# EAGLE board display_tiled (EAGLE 5.02)
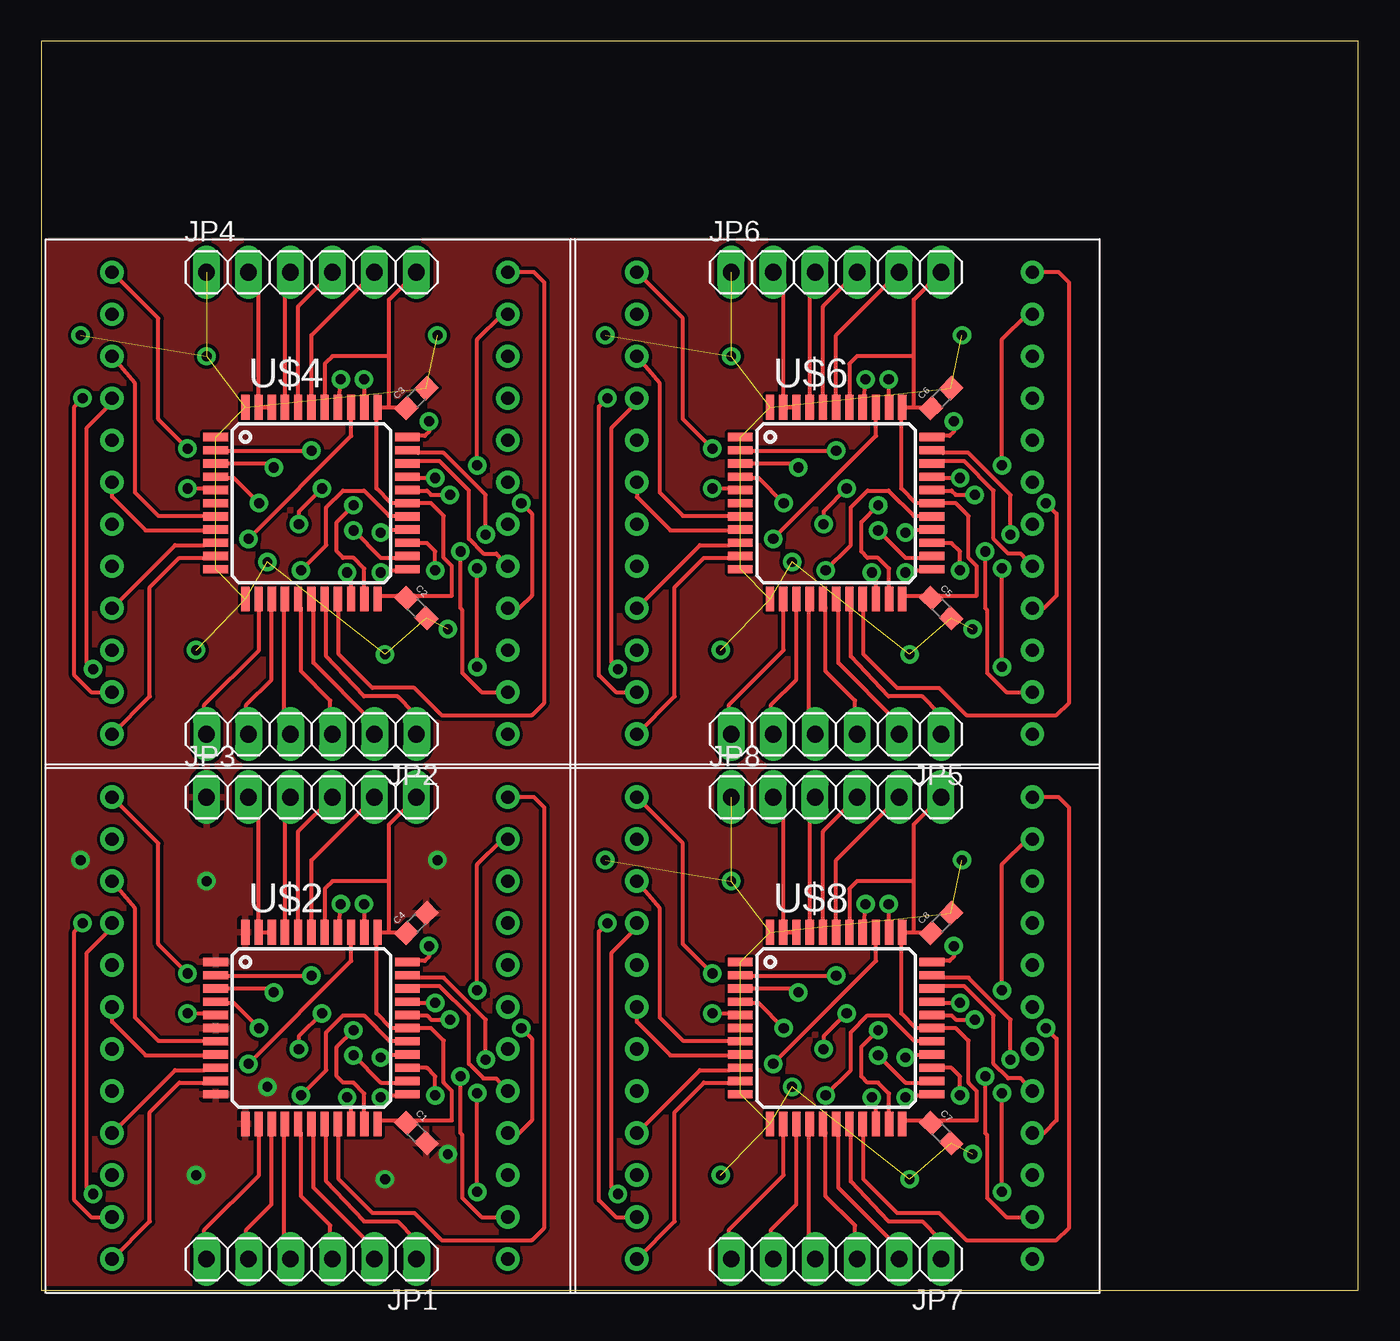
[diagram p0: board, top side]
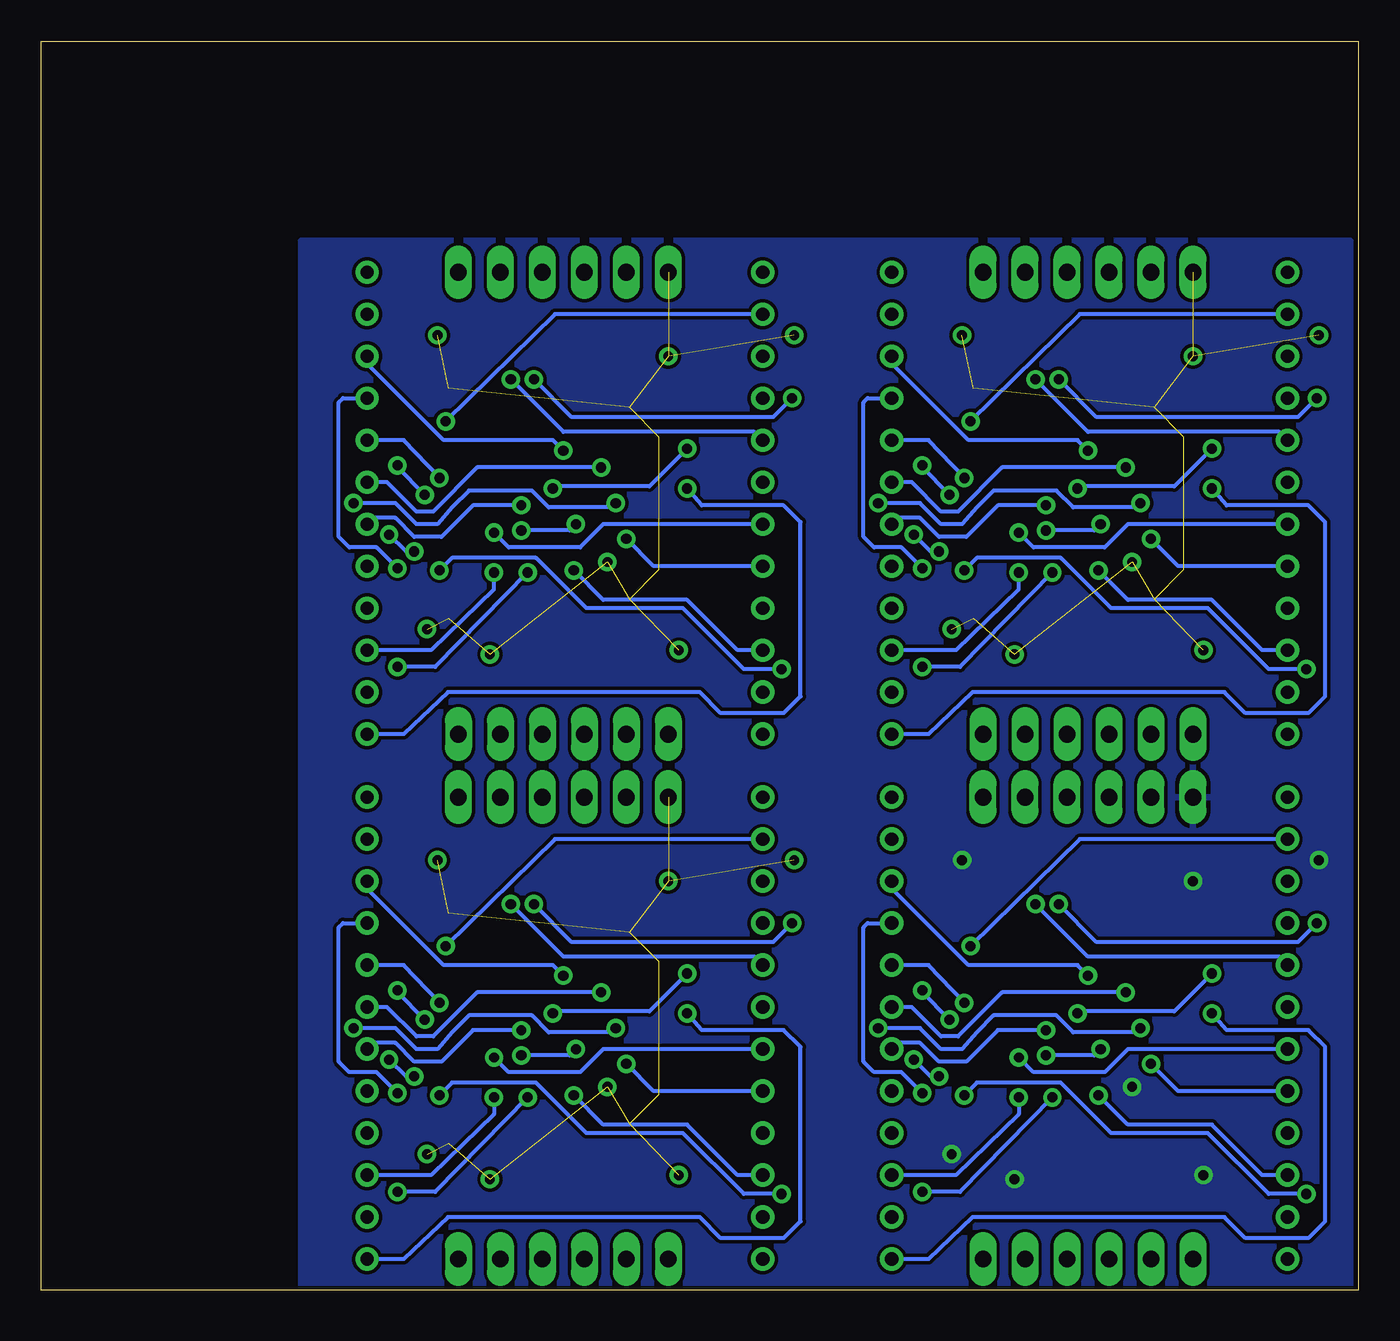
[diagram p1: board, bottom side, seen from below]

Size 79.68 x 75.55 mm. Coordinates in mm from the lower left corner, seen from the top.
Outline: 0,0 79.68,0 79.68,75.55 0,75.55 0,0
Copper layers (1*16): Top 0.035mm / dielectric 1.5mm / Bottom 0.035mm
Design rules "SparkFun": minimum track width 8mil, minimum drill 20mil, track to track 8mil, track to pad 8mil, pad to pad 8mil, via to via 8mil, smd to smd 8mil, copper to edge 10mil, drill to drill 8mil, minimum pad ring 12mil, minimum via ring 10mil, stop-mask expansion 4mil, vias tented up to drill 25mil, thermal gap 10mil

## Footprints (pad centres in the part's own frame; a part is rotated, then mirrored left to right if it is on the bottom)
0603 = smd 1.1 x 1: 1 -0.85,0; 2 0.85,0
1X06 = drill 1.016 long: 1 -6.35,0; 2 -3.81,0; 3 -1.27,0; 4 1.27,0; 5 3.81,0; 6 6.35,0
FYM-12881ABXX = drill 0.8 round: P$1 0,0; P$2 0,-2.54; P$3 0,-5.08; P$4 0,-7.62; P$5 0,-10.16; P$6 0,-12.7; P$7 0,-15.24; P$8 0,-17.78; P$9 0,-20.32; P$10 0,-22.86; P$11 0,-25.4; P$12 0,-27.94; P$13 23.94,-27.94; P$14 23.94,-25.4; P$15 23.94,-22.86; P$16 23.94,-20.32; P$17 23.94,-17.78; P$18 23.94,-15.24; P$19 23.94,-12.7; P$20 23.94,-10.16; P$21 23.94,-7.62; P$22 23.94,-5.08; P$23 23.94,-2.54; P$24 23.94,0
TQFP44 = smd 1.5 x 0.5: 1 -5.8,4; 2 -5.8,3.2; 3 -5.8,2.4; 4 -5.8,1.6; 5 -5.8,0.8; 6 -5.8,0; 7 -5.8,-0.8; 8 -5.8,-1.6; 9 -5.8,-2.4; 10 -5.8,-3.2; 11 -5.8,-4; 23 5.8,-4; 24 5.8,-3.2; 25 5.8,-2.4; 26 5.8,-1.6; 27 5.8,-0.8; 28 5.8,0; 29 5.8,0.8; 30 5.8,1.6; 31 5.8,2.4; 32 5.8,3.2; 33 5.8,4 | smd 0.5 x 1.5: 12 -4,-5.8; 13 -3.2,-5.8; 14 -2.4,-5.8; 15 -1.6,-5.8; 16 -0.8,-5.8; 17 0,-5.8; 18 0.8,-5.8; 19 1.6,-5.8; 20 2.4,-5.8; 21 3.2,-5.8; 22 4,-5.8; 34 4,5.8; 35 3.2,5.8; 36 2.4,5.8; 37 1.6,5.8; 38 0.8,5.8; 39 0,5.8; 40 -0.8,5.8; 41 -1.6,5.8; 42 -2.4,5.8; 43 -3.2,5.8; 44 -4,5.8

## Placement (x,y rotation side)
C1  [0603]  22.7,9.52 315 top
C2  [0603]  22.7,41.27 315 top
C3  [0603]  22.7,53.97 45 top
C4  [0603]  22.7,22.22 45 top
C5  [0603]  54.45,41.27 315 top
C6  [0603]  54.45,53.97 45 top
C7  [0603]  54.45,9.52 315 top
C8  [0603]  54.45,22.22 45 top
JP1  [1X06]  16.34,1.9 180 top
JP2  [1X06]  16.34,33.65 180 top
JP3  [1X06]  16.34,29.84 0 top
JP4  [1X06]  16.34,61.59 0 top
JP5  [1X06]  48.1,33.65 180 top
JP6  [1X06]  48.1,61.59 0 top
JP7  [1X06]  48.1,1.9 180 top
JP8  [1X06]  48.1,29.84 0 top
U$1  FYM-1228AXX  [FYM-12881ABXX]  4.28,29.84 0 top
U$2  MAX6960  [TQFP44]  16.34,15.87 0 top
U$3  FYM-1228AXX  [FYM-12881ABXX]  4.28,61.59 0 top
U$4  MAX6960  [TQFP44]  16.34,47.62 0 top
U$5  FYM-1228AXX  [FYM-12881ABXX]  36.03,61.59 0 top
U$6  MAX6960  [TQFP44]  48.1,47.62 0 top
U$7  FYM-1228AXX  [FYM-12881ABXX]  36.03,29.84 0 top
U$8  MAX6960  [TQFP44]  48.1,15.87 0 top

## Library data of the parts
C1-C8 = SparkFun
JP1-JP8 = pinhead
U$1 U$3 U$5 U$7 = john
U$2 U$4 U$6 U$8 = maxim

## Nets
ADDCLK: JP3.3 U$2.41
ADDCLK1: JP4.3 U$4.41
ADDCLK2: JP6.3 U$6.41
ADDCLK3: JP8.3 U$8.41
ADDIN: JP3.4 U$2.40
ADDIN1: JP4.4 U$4.40
ADDIN2: JP6.4 U$6.40
ADDIN3: JP8.4 U$8.40
ADDOUT: JP3.5 U$2.39
ADDOUT1: JP4.5 U$4.39
ADDOUT2: JP6.5 U$6.39
ADDOUT3: JP8.5 U$8.39
CLK: JP1.2 U$2.17
CLK1: JP2.2 U$4.17
CLK2: JP5.2 U$6.17
CLK3: JP7.2 U$8.17
CS: JP1.5 U$2.14
CS1: JP2.5 U$4.14
CS2: JP5.5 U$6.14
CS3: JP7.5 U$8.14
DIN: JP1.4 U$2.15
DIN1: JP2.4 U$4.15
DIN2: JP5.4 U$6.15
DIN3: JP7.4 U$8.15
DOUT: JP1.3 U$2.16
DOUT1: JP2.3 U$4.16
DOUT2: JP5.3 U$6.16
DOUT3: JP7.3 U$8.16
GND: C1.2 C4.2 JP3.1 U$2.1 U$2.6 U$2.11 U$2.12 U$2.44
GND1: C2.2 C3.2 JP4.1 U$4.1 U$4.6 U$4.11 U$4.12 U$4.44
GND2: C5.2 C6.2 JP6.1 U$6.1 U$6.6 U$6.11 U$6.12 U$6.44
GND3: C7.2 C8.2 JP8.1 U$8.1 U$8.6 U$8.11 U$8.12 U$8.44
N$1: U$1.P$24 U$2.19
N$2: U$1.P$21 U$2.20
N$3: U$1.P$18 U$2.21
N$4: U$1.P$15 U$2.23
N$5: U$1.P$1 U$2.24
N$6: U$1.P$4 U$2.25
N$7: U$1.P$7 U$2.26
N$8: U$1.P$10 U$2.27
N$9: U$1.P$23 U$2.29
N$10: U$1.P$20 U$2.30
N$11: U$1.P$17 U$2.31
N$12: U$1.P$14 U$2.32
N$13: U$1.P$2 U$2.33
N$14: U$1.P$5 U$2.35
N$15: U$1.P$8 U$2.36
N$16: U$1.P$11 U$2.37
N$17: U$3.P$24 U$4.19
N$18: U$3.P$21 U$4.20
N$19: U$3.P$18 U$4.21
N$20: U$3.P$15 U$4.23
N$21: U$3.P$1 U$4.24
N$22: U$3.P$4 U$4.25
N$23: U$3.P$7 U$4.26
N$24: U$3.P$10 U$4.27
N$25: U$3.P$23 U$4.29
N$26: U$3.P$20 U$4.30
N$27: U$3.P$17 U$4.31
N$28: U$3.P$14 U$4.32
N$29: U$3.P$2 U$4.33
N$30: U$3.P$5 U$4.35
N$31: U$3.P$8 U$4.36
N$32: U$3.P$11 U$4.37
N$33: U$5.P$24 U$6.19
N$34: U$5.P$21 U$6.20
N$35: U$5.P$18 U$6.21
N$36: U$5.P$15 U$6.23
N$37: U$5.P$1 U$6.24
N$38: U$5.P$4 U$6.25
N$39: U$5.P$7 U$6.26
N$40: U$5.P$10 U$6.27
N$41: U$5.P$23 U$6.29
N$42: U$5.P$20 U$6.30
N$43: U$5.P$17 U$6.31
N$44: U$5.P$14 U$6.32
N$45: U$5.P$2 U$6.33
N$46: U$5.P$5 U$6.35
N$47: U$5.P$8 U$6.36
N$48: U$5.P$11 U$6.37
N$49: U$7.P$24 U$8.19
N$50: U$7.P$21 U$8.20
N$51: U$7.P$18 U$8.21
N$52: U$7.P$15 U$8.23
N$53: U$7.P$1 U$8.24
N$54: U$7.P$4 U$8.25
N$55: U$7.P$7 U$8.26
N$56: U$7.P$10 U$8.27
N$57: U$7.P$23 U$8.29
N$58: U$7.P$20 U$8.30
N$59: U$7.P$17 U$8.31
N$60: U$7.P$14 U$8.32
N$61: U$7.P$2 U$8.33
N$62: U$7.P$5 U$8.35
N$63: U$7.P$8 U$8.36
N$64: U$7.P$11 U$8.37
OSC: JP1.6 U$2.13
OSC1: JP2.6 U$4.13
OSC2: JP5.6 U$6.13
OSC3: JP7.6 U$8.13
RISET: JP3.2 U$2.42 U$2.43
RISET1: JP4.2 U$4.42 U$4.43
RISET2: JP6.2 U$6.42 U$6.43
RISET3: JP8.2 U$8.42 U$8.43
ROW1: U$1.P$22 U$2.2
ROW2: U$1.P$19 U$2.3
ROW3: U$1.P$16 U$2.4
ROW4: U$1.P$13 U$2.5
ROW5: U$1.P$3 U$2.7
ROW6: U$1.P$6 U$2.8
ROW7: U$1.P$9 U$2.9
ROW8: U$1.P$12 U$2.10
ROW9: U$3.P$22 U$4.2
ROW10: U$3.P$19 U$4.3
ROW11: U$3.P$16 U$4.4
ROW12: U$3.P$13 U$4.5
ROW13: U$3.P$3 U$4.7
ROW14: U$3.P$6 U$4.8
ROW15: U$3.P$9 U$4.9
ROW16: U$3.P$12 U$4.10
ROW17: U$5.P$22 U$6.2
ROW18: U$5.P$19 U$6.3
ROW19: U$5.P$16 U$6.4
ROW20: U$5.P$13 U$6.5
ROW21: U$5.P$3 U$6.7
ROW22: U$5.P$6 U$6.8
ROW23: U$5.P$9 U$6.9
ROW24: U$5.P$12 U$6.10
ROW25: U$7.P$22 U$8.2
ROW26: U$7.P$19 U$8.3
ROW27: U$7.P$16 U$8.4
ROW28: U$7.P$13 U$8.5
ROW29: U$7.P$3 U$8.7
ROW30: U$7.P$6 U$8.8
ROW31: U$7.P$9 U$8.9
ROW32: U$7.P$12 U$8.10
RST: JP1.1 U$2.18
RST1: JP2.1 U$4.18
RST2: JP5.1 U$6.18
RST3: JP7.1 U$8.18
VCC: C1.1 C4.1 JP3.6 U$2.22 U$2.28 U$2.34 U$2.38
VCC1: C2.1 C3.1 JP4.6 U$4.22 U$4.28 U$4.34 U$4.38
VCC2: C5.1 C6.1 JP6.6 U$6.22 U$6.28 U$6.34 U$6.38
VCC3: C7.1 C8.1 JP8.6 U$8.22 U$8.28 U$8.34 U$8.38

## Tracks (layer width: path | path; a pad name or v marks a point on that pad's centre or on a via)
ADDCLK
  Top 0.254: U$2.41 14.74,29.51 JP3.3
ADDCLK1
  Top 0.254: U$4.41 14.74,61.26 JP4.3
ADDCLK2
  Top 0.254: U$6.41 46.5,61.26 JP6.3
ADDCLK3
  Top 0.254: U$8.41 46.5,29.51 JP8.3
ADDIN
  Top 0.254: U$2.40 15.54,27.77 JP3.4
ADDIN1
  Top 0.254: U$4.40 15.54,59.52 JP4.4
ADDIN2
  Top 0.254: U$6.40 47.3,59.52 JP6.4
ADDIN3
  Top 0.254: U$8.40 47.3,27.77 JP8.4
ADDOUT
  Top 0.254: U$2.39 16.34,26.03 JP3.5
ADDOUT1
  Top 0.254: U$4.39 16.34,57.78 JP4.5
ADDOUT2
  Top 0.254: U$6.39 48.1,57.78 JP6.5
ADDOUT3
  Top 0.254: U$8.39 48.1,26.03 JP8.5
CLK
  Top 0.254: U$2.17 16.47,9.52 16.47,6.22 20.03,2.66 20.03,2.28 JP1.2
CLK1
  Top 0.254: U$4.17 16.47,41.27 16.47,37.97 20.03,34.41 20.03,34.03 JP2.2
CLK2
  Top 0.254: U$6.17 48.22,41.27 48.22,37.97 51.78,34.41 51.78,34.03 JP5.2
CLK3
  Top 0.254: U$8.17 48.22,9.52 48.22,6.22 51.78,2.66 51.78,2.28 JP7.2
CS
  Top 0.254: U$2.14 13.93,9.52 13.93,5.2 12.41,3.68 12.41,2.66 JP1.5
CS1
  Top 0.254: U$4.14 13.93,41.27 13.93,36.95 12.41,35.43 12.41,34.41 JP2.5
CS2
  Top 0.254: U$6.14 45.68,41.27 45.68,36.95 44.16,35.43 44.16,34.41 JP5.5
CS3
  Top 0.254: U$8.14 45.68,9.52 45.68,5.2 44.16,3.68 44.16,2.66 JP7.5
DIN
  Top 0.254: U$2.15 14.69,9.52 14.69,3.17 JP1.4
DIN1
  Top 0.254: U$4.15 14.69,41.27 14.69,34.92 JP2.4
DIN2
  Top 0.254: U$6.15 46.44,41.27 46.44,34.92 JP5.4
DIN3
  Top 0.254: U$8.15 46.44,9.52 46.44,3.17 JP7.4
DOUT
  Top 0.254: U$2.16 15.71,9.52 15.71,5.71 17.49,3.93 17.49,2.92 JP1.3
DOUT1
  Top 0.254: U$4.16 15.71,41.27 15.71,37.46 17.49,35.68 17.49,34.67 JP2.3
DOUT2
  Top 0.254: U$6.16 47.46,41.27 47.46,37.46 49.24,35.68 49.24,34.67 JP5.3
DOUT3
  Top 0.254: U$8.16 47.46,9.52 47.46,5.71 49.24,3.93 49.24,2.92 JP7.3
GND  (via drill 0.6)
  other vias: 23.96,26.03 9.36,6.98 24.6,8.25 13.68,12.31 20.79,6.73 2.38,26.03 9.99,24.76
  pour Bottom: 0.47,63.5 63.97,63.5 63.97,-0.01 0.47,-0.01
  pour Top: 0.47,63.5 63.97,63.5 63.97,-0.01 0.47,-0.01
GND1  (via drill 0.6)  (14 unrouted)
  other vias: 23.96,57.78 9.36,38.73 24.6,40 13.68,44.06 20.79,38.48 2.38,57.78 9.99,56.51
GND2  (via drill 0.6)  (14 unrouted)
  other vias: 55.72,57.78 41.11,38.73 56.35,40 45.43,44.06 52.54,38.48 34.12,57.78 41.75,56.51
GND3  (via drill 0.6)  (14 unrouted)
  other vias: 55.72,26.03 41.11,6.98 56.35,8.25 45.43,12.31 52.54,6.73 34.12,26.03 41.75,24.76
N$1
  Top 0.254: U$2.19 18,9.52 18,6.73 20.03,4.69 22.57,4.69 24.22,3.04 29.68,3.04 30.44,3.81 30.44,29.2 29.81,29.84 U$1.P$24
N$2  (via drill 0.61)
  Top 0.254: v18.5,11.68 18.76,11.3 18.76,10.79 U$2.20 | v26.38,5.96 v26.38,11.93
  Bottom 0.254: v18.5,11.68 24.09,5.96 v26.38,5.96 | v26.38,11.93 27.65,13.2 29.3,13.2 29.93,13.84 29.93,21.97 29.68,22.22 U$1.P$21
N$3  (via drill 0.6)
  Top 0.254: U$2.21 19.54,11.91 18.88,12.57 18.25,12.57 17.87,12.95 17.87,14.73 v18.88,15.74
  Bottom 0.254: v18.88,15.74 21.81,15.74 23.71,13.84 25.36,13.84 26.5,14.98 27.9,14.98 28.28,14.6 U$1.P$18
N$4  (via drill 0.61)
  Top 0.254: v20.54,11.68 20.66,11.81 21.55,11.81 U$2.23
  Bottom 0.254: v20.54,11.68 20.54,10.66 24.35,6.98 U$1.P$15
N$5  (via drill 0.61)
  Top 0.254: v18.88,14.22 20.54,12.57 21.55,12.57 U$2.24 | v16.98,16.76 15.58,15.36 v15.58,14.6 | v8.85,19.17 7.07,20.95 7.07,27.05 U$1.P$1
  Bottom 0.254: v15.58,14.6 15.96,14.22 v18.88,14.22 | v16.98,16.76 16.73,16.89 11.14,16.89 v8.85,19.17
N$6  (via drill 0.61)
  Top 0.254: v23.84,11.81 23.84,12.95 23.33,13.46 22.06,13.46 U$2.25 | v3.14,5.84 2.76,6.22 2.76,20.44 4.28,21.97 | 4.28,21.97 4.28,21.84 | 4.28,21.97 U$1.P$4
  Bottom 0.254: v23.84,11.81 23.08,12.57 18,12.57 14.95,9.52 9.11,9.52 5.42,5.84 v3.14,5.84
N$7  (via drill 0.6)
  Top 0.254: U$2.26 20.71,14.27 v20.54,14.09
  Bottom 0.254: v20.54,14.09 19.65,13.2 15.33,13.2 13.93,14.6 U$1.P$7
N$8  (via drill 0.61)
  Top 0.254: v15.71,11.81 17.23,13.33 17.23,15.62 18.25,16.63 19.52,16.63 21.04,15.11 21.93,15.11 U$2.27
  Bottom 0.254: v15.71,11.81 13.93,10.03 8.85,10.03 5.8,6.98 U$1.P$10
N$9  (via drill 0.61)
  Top 0.254: v24.73,16.38 23.58,16.38 23.33,16.63 22.82,16.63 U$2.29 | v26.38,18.16 26.38,25.78 27.9,27.3 U$1.P$23
  Bottom 0.254: v24.73,16.38 26.38,18.03 v26.38,18.16
N$10  (via drill 0.61)
  Top 0.254: U$2.30 22.19,17.52 22.31,17.39 v23.84,17.39
  Bottom 0.254: v23.84,17.39 26,19.68 U$1.P$20
N$11
  Top 0.254: U$2.31 22.82,18.41 24.09,18.41 25.87,16.63 25.87,13.71 26.76,12.82 27.52,12.82 U$1.P$17
N$12  (via drill 0.61)
  Top 0.254: v26.89,13.96 26.89,16.38 24.35,18.92 22.82,18.92 U$2.32 | v25.36,12.95 25.36,9.52 25.49,9.39 25.49,5.58 26.63,4.44 U$1.P$14
  Bottom 0.254: v26.89,13.96 25.87,12.95 v25.36,12.95
N$13  (via drill 0.61)
  Top 0.254: v23.46,20.82 23.46,20.19 23.2,19.93 22.82,19.93 U$2.33
  Bottom 0.254: v23.46,20.82 16.85,27.3 U$1.P$2
N$14  (via drill 0.61)
  Top 0.254: v19.52,23.36 19.52,22.22 U$2.35
  Bottom 0.254: v19.52,23.36 16.34,20.19 4.79,20.19 U$1.P$5
N$15  (via drill 0.61)
  Top 0.254: v12.54,13.71 18.76,19.93 18.76,20.95 U$2.36
  Bottom 0.254: v12.54,13.71 10.88,12.06 U$1.P$8
N$16  (via drill 0.61)
  Top 0.254: v18.12,23.36 18,22.22 U$2.37 | v2.5,22.22 1.99,21.71 1.99,5.46 3.01,4.44 U$1.P$11
  Bottom 0.254: v18.12,23.36 15.84,21.08 3.65,21.08 v2.5,22.22
N$17
  Top 0.254: U$4.19 18,41.27 18,38.48 20.03,36.44 22.57,36.44 24.22,34.79 29.68,34.79 30.44,35.55 30.44,60.95 29.81,61.59 U$3.P$24
N$18  (via drill 0.61)
  Top 0.254: v18.5,43.43 18.76,43.05 18.76,42.54 U$4.20 | v26.38,37.71 v26.38,43.68
  Bottom 0.254: v18.5,43.43 24.09,37.71 v26.38,37.71 | v26.38,43.68 27.65,44.95 29.3,44.95 29.93,45.59 29.93,53.72 29.68,53.97 U$3.P$21
N$19  (via drill 0.6)
  Top 0.254: U$4.21 19.54,43.66 18.88,44.32 18.25,44.32 17.87,44.7 17.87,46.48 v18.88,47.49
  Bottom 0.254: v18.88,47.49 21.81,47.49 23.71,45.59 25.36,45.59 26.5,46.73 27.9,46.73 28.28,46.35 U$3.P$18
N$20  (via drill 0.61)
  Top 0.254: v20.54,43.43 20.66,43.56 21.55,43.56 U$4.23
  Bottom 0.254: v20.54,43.43 20.54,42.41 24.35,38.73 U$3.P$15
N$21  (via drill 0.61)
  Top 0.254: v18.88,45.97 20.54,44.32 21.55,44.32 U$4.24 | v16.98,48.51 15.58,47.11 v15.58,46.35 | v8.85,50.92 7.07,52.7 7.07,58.8 U$3.P$1
  Bottom 0.254: v15.58,46.35 15.96,45.97 v18.88,45.97 | v16.98,48.51 16.73,48.64 11.14,48.64 v8.85,50.92
N$22  (via drill 0.61)
  Top 0.254: v23.84,43.56 23.84,44.7 23.33,45.21 22.06,45.21 U$4.25 | v3.14,37.59 2.76,37.97 2.76,52.19 4.28,53.72 | 4.28,53.72 4.28,53.59 | 4.28,53.72 U$3.P$4
  Bottom 0.254: v23.84,43.56 23.08,44.32 18,44.32 14.95,41.27 9.11,41.27 5.42,37.59 v3.14,37.59
N$23  (via drill 0.6)
  Top 0.254: U$4.26 20.71,46.02 v20.54,45.84
  Bottom 0.254: v20.54,45.84 19.65,44.95 15.33,44.95 13.93,46.35 U$3.P$7
N$24  (via drill 0.61)
  Top 0.254: v15.71,43.56 17.23,45.08 17.23,47.37 18.25,48.38 19.52,48.38 21.04,46.86 21.93,46.86 U$4.27
  Bottom 0.254: v15.71,43.56 13.93,41.78 8.85,41.78 5.8,38.73 U$3.P$10
N$25  (via drill 0.61)
  Top 0.254: v24.73,48.13 23.58,48.13 23.33,48.38 22.82,48.38 U$4.29 | v26.38,49.91 26.38,57.53 27.9,59.05 U$3.P$23
  Bottom 0.254: v24.73,48.13 26.38,49.78 v26.38,49.91
N$26  (via drill 0.61)
  Top 0.254: U$4.30 22.19,49.27 22.31,49.14 v23.84,49.14
  Bottom 0.254: v23.84,49.14 26,51.43 U$3.P$20
N$27
  Top 0.254: U$4.31 22.82,50.16 24.09,50.16 25.87,48.38 25.87,45.46 26.76,44.57 27.52,44.57 U$3.P$17
N$28  (via drill 0.61)
  Top 0.254: v26.89,45.71 26.89,48.13 24.35,50.67 22.82,50.67 U$4.32 | v25.36,44.7 25.36,41.27 25.49,41.14 25.49,37.33 26.63,36.19 U$3.P$14
  Bottom 0.254: v26.89,45.71 25.87,44.7 v25.36,44.7
N$29  (via drill 0.61)
  Top 0.254: v23.46,52.57 23.46,51.94 23.2,51.68 22.82,51.68 U$4.33
  Bottom 0.254: v23.46,52.57 16.85,59.05 U$3.P$2
N$30  (via drill 0.61)
  Top 0.254: v19.52,55.11 19.52,53.97 U$4.35
  Bottom 0.254: v19.52,55.11 16.34,51.94 4.79,51.94 U$3.P$5
N$31  (via drill 0.61)
  Top 0.254: v12.54,45.46 18.76,51.68 18.76,52.7 U$4.36
  Bottom 0.254: v12.54,45.46 10.88,43.81 U$3.P$8
N$32  (via drill 0.61)
  Top 0.254: v18.12,55.11 18,53.97 U$4.37 | v2.5,53.97 1.99,53.46 1.99,37.21 3.01,36.19 U$3.P$11
  Bottom 0.254: v18.12,55.11 15.84,52.83 3.65,52.83 v2.5,53.97
N$33
  Top 0.254: U$6.19 49.75,41.27 49.75,38.48 51.78,36.44 54.32,36.44 55.97,34.79 61.43,34.79 62.19,35.55 62.19,60.95 61.56,61.59 U$5.P$24
N$34  (via drill 0.61)
  Top 0.254: v50.25,43.43 50.51,43.05 50.51,42.54 U$6.20 | v58.13,37.71 v58.13,43.68
  Bottom 0.254: v50.25,43.43 55.84,37.71 v58.13,37.71 | v58.13,43.68 59.4,44.95 61.05,44.95 61.68,45.59 61.68,53.72 61.43,53.97 U$5.P$21
N$35  (via drill 0.6)
  Top 0.254: U$6.21 51.3,43.66 50.64,44.32 50,44.32 49.62,44.7 49.62,46.48 v50.64,47.49
  Bottom 0.254: v50.64,47.49 53.56,47.49 55.46,45.59 57.11,45.59 58.26,46.73 59.65,46.73 60.03,46.35 U$5.P$18
N$36  (via drill 0.61)
  Top 0.254: v52.29,43.43 52.41,43.56 53.3,43.56 U$6.23
  Bottom 0.254: v52.29,43.43 52.29,42.41 56.1,38.73 U$5.P$15
N$37  (via drill 0.61)
  Top 0.254: v50.64,45.97 52.29,44.32 53.3,44.32 U$6.24 | v48.73,48.51 47.33,47.11 v47.33,46.35 | v40.6,50.92 38.82,52.7 38.82,58.8 U$5.P$1
  Bottom 0.254: v47.33,46.35 47.71,45.97 v50.64,45.97 | v48.73,48.51 48.48,48.64 42.89,48.64 v40.6,50.92
N$38  (via drill 0.61)
  Top 0.254: v55.59,43.56 55.59,44.7 55.08,45.21 53.81,45.21 U$6.25 | v34.89,37.59 34.51,37.97 34.51,52.19 36.03,53.72 | 36.03,53.72 36.03,53.59 | 36.03,53.72 U$5.P$4
  Bottom 0.254: v55.59,43.56 54.83,44.32 49.75,44.32 46.7,41.27 40.86,41.27 37.17,37.59 v34.89,37.59
N$39  (via drill 0.6)
  Top 0.254: U$6.26 52.46,46.02 v52.29,45.84
  Bottom 0.254: v52.29,45.84 51.4,44.95 47.08,44.95 45.68,46.35 U$5.P$7
N$40  (via drill 0.61)
  Top 0.254: v47.46,43.56 48.98,45.08 48.98,47.37 50,48.38 51.27,48.38 52.79,46.86 53.68,46.86 U$6.27
  Bottom 0.254: v47.46,43.56 45.68,41.78 40.6,41.78 37.55,38.73 U$5.P$10
N$41  (via drill 0.61)
  Top 0.254: v56.48,48.13 55.33,48.13 55.08,48.38 54.57,48.38 U$6.29 | v58.13,49.91 58.13,57.53 59.65,59.05 U$5.P$23
  Bottom 0.254: v56.48,48.13 58.13,49.78 v58.13,49.91
N$42  (via drill 0.61)
  Top 0.254: U$6.30 53.94,49.27 54.06,49.14 v55.59,49.14
  Bottom 0.254: v55.59,49.14 57.75,51.43 U$5.P$20
N$43
  Top 0.254: U$6.31 54.57,50.16 55.84,50.16 57.62,48.38 57.62,45.46 58.51,44.57 59.27,44.57 U$5.P$17
N$44  (via drill 0.61)
  Top 0.254: v58.64,45.71 58.64,48.13 56.1,50.67 54.57,50.67 U$6.32 | v57.11,44.7 57.11,41.27 57.24,41.14 57.24,37.33 58.38,36.19 U$5.P$14
  Bottom 0.254: v58.64,45.71 57.62,44.7 v57.11,44.7
N$45  (via drill 0.61)
  Top 0.254: v55.21,52.57 55.21,51.94 54.95,51.68 54.57,51.68 U$6.33
  Bottom 0.254: v55.21,52.57 48.6,59.05 U$5.P$2
N$46  (via drill 0.61)
  Top 0.254: v51.27,55.11 51.27,53.97 U$6.35
  Bottom 0.254: v51.27,55.11 48.1,51.94 36.54,51.94 U$5.P$5
N$47  (via drill 0.61)
  Top 0.254: v44.29,45.46 50.51,51.68 50.51,52.7 U$6.36
  Bottom 0.254: v44.29,45.46 42.63,43.81 U$5.P$8
N$48  (via drill 0.61)
  Top 0.254: v49.87,55.11 49.75,53.97 U$6.37 | v34.25,53.97 33.74,53.46 33.74,37.21 34.76,36.19 U$5.P$11
  Bottom 0.254: v49.87,55.11 47.59,52.83 35.4,52.83 v34.25,53.97
N$49
  Top 0.254: U$8.19 49.75,9.52 49.75,6.73 51.78,4.69 54.32,4.69 55.97,3.04 61.43,3.04 62.19,3.81 62.19,29.2 61.56,29.84 U$7.P$24
N$50  (via drill 0.61)
  Top 0.254: v50.25,11.68 50.51,11.3 50.51,10.79 U$8.20 | v58.13,5.96 v58.13,11.93
  Bottom 0.254: v50.25,11.68 55.84,5.96 v58.13,5.96 | v58.13,11.93 59.4,13.2 61.05,13.2 61.68,13.84 61.68,21.97 61.43,22.22 U$7.P$21
N$51  (via drill 0.6)
  Top 0.254: U$8.21 51.3,11.91 50.64,12.57 50,12.57 49.62,12.95 49.62,14.73 v50.64,15.74
  Bottom 0.254: v50.64,15.74 53.56,15.74 55.46,13.84 57.11,13.84 58.26,14.98 59.65,14.98 60.03,14.6 U$7.P$18
N$52  (via drill 0.61)
  Top 0.254: v52.29,11.68 52.41,11.81 53.3,11.81 U$8.23
  Bottom 0.254: v52.29,11.68 52.29,10.66 56.1,6.98 U$7.P$15
N$53  (via drill 0.61)
  Top 0.254: v50.64,14.22 52.29,12.57 53.3,12.57 U$8.24 | v48.73,16.76 47.33,15.36 v47.33,14.6 | v40.6,19.17 38.82,20.95 38.82,27.05 U$7.P$1
  Bottom 0.254: v47.33,14.6 47.71,14.22 v50.64,14.22 | v48.73,16.76 48.48,16.89 42.89,16.89 v40.6,19.17
N$54  (via drill 0.61)
  Top 0.254: v55.59,11.81 55.59,12.95 55.08,13.46 53.81,13.46 U$8.25 | v34.89,5.84 34.51,6.22 34.51,20.44 36.03,21.97 | 36.03,21.97 36.03,21.84 | 36.03,21.97 U$7.P$4
  Bottom 0.254: v55.59,11.81 54.83,12.57 49.75,12.57 46.7,9.52 40.86,9.52 37.17,5.84 v34.89,5.84
N$55  (via drill 0.6)
  Top 0.254: U$8.26 52.46,14.27 v52.29,14.09
  Bottom 0.254: v52.29,14.09 51.4,13.2 47.08,13.2 45.68,14.6 U$7.P$7
N$56  (via drill 0.61)
  Top 0.254: v47.46,11.81 48.98,13.33 48.98,15.62 50,16.63 51.27,16.63 52.79,15.11 53.68,15.11 U$8.27
  Bottom 0.254: v47.46,11.81 45.68,10.03 40.6,10.03 37.55,6.98 U$7.P$10
N$57  (via drill 0.61)
  Top 0.254: v56.48,16.38 55.33,16.38 55.08,16.63 54.57,16.63 U$8.29 | v58.13,18.16 58.13,25.78 59.65,27.3 U$7.P$23
  Bottom 0.254: v56.48,16.38 58.13,18.03 v58.13,18.16
N$58  (via drill 0.61)
  Top 0.254: U$8.30 53.94,17.52 54.06,17.39 v55.59,17.39
  Bottom 0.254: v55.59,17.39 57.75,19.68 U$7.P$20
N$59
  Top 0.254: U$8.31 54.57,18.41 55.84,18.41 57.62,16.63 57.62,13.71 58.51,12.82 59.27,12.82 U$7.P$17
N$60  (via drill 0.61)
  Top 0.254: v58.64,13.96 58.64,16.38 56.1,18.92 54.57,18.92 U$8.32 | v57.11,12.95 57.11,9.52 57.24,9.39 57.24,5.58 58.38,4.44 U$7.P$14
  Bottom 0.254: v58.64,13.96 57.62,12.95 v57.11,12.95
N$61  (via drill 0.61)
  Top 0.254: v55.21,20.82 55.21,20.19 54.95,19.93 54.57,19.93 U$8.33
  Bottom 0.254: v55.21,20.82 48.6,27.3 U$7.P$2
N$62  (via drill 0.61)
  Top 0.254: v51.27,23.36 51.27,22.22 U$8.35
  Bottom 0.254: v51.27,23.36 48.1,20.19 36.54,20.19 U$7.P$5
N$63  (via drill 0.61)
  Top 0.254: v44.29,13.71 50.51,19.93 50.51,20.95 U$8.36
  Bottom 0.254: v44.29,13.71 42.63,12.06 U$7.P$8
N$64  (via drill 0.61)
  Top 0.254: v49.87,23.36 49.75,22.22 U$8.37 | v34.25,22.22 33.74,21.71 33.74,5.46 34.76,4.44 U$7.P$11
  Bottom 0.254: v49.87,23.36 47.59,21.08 35.4,21.08 v34.25,22.22
OSC
  Top 0.254: U$2.13 13.17,9.52 13.17,6.98 9.87,3.68 9.87,2.66 JP1.6
OSC1
  Top 0.254: U$4.13 13.17,41.27 13.17,38.73 9.87,35.43 9.87,34.41 JP2.6
OSC2
  Top 0.254: U$6.13 44.92,41.27 44.92,38.73 41.62,35.43 41.62,34.41 JP5.6
OSC3
  Top 0.254: U$8.13 44.92,9.52 44.92,6.98 41.62,3.68 41.62,2.66 JP7.6
RISET
  Top 0.254: JP3.2 13.14,29.23 U$2.43 13.72,21.67 13.8,21.59 13.89,21.67 U$2.42
RISET1
  Top 0.254: JP4.2 13.14,60.98 U$4.43 13.72,53.42 13.8,53.34 13.89,53.42 U$4.42
RISET2
  Top 0.254: JP6.2 44.9,60.98 U$6.43 45.47,53.42 45.55,53.34 45.64,53.42 U$6.42
RISET3
  Top 0.254: JP8.2 44.9,29.23 U$8.43 45.47,21.67 45.55,21.59 45.64,21.67 U$8.42
ROW1  (via drill 0.61)
  Top 0.254: v16.34,19.04 10.88,19.04 U$2.2
  Bottom 0.254: v16.34,19.04 16.98,19.68 23.58,19.68 28.16,24.25 28.16,24.63 U$1.P$22
ROW2  (via drill 0.61)
  Top 0.254: v14.06,18.03 13.8,18.28 10.76,18.28 U$2.3
  Bottom 0.254: v14.06,18.03 21.55,18.03 24.22,15.36 25.23,15.36 27.01,17.14 U$1.P$19
ROW3  (via drill 0.61)
  Top 0.254: v13.17,15.87 11.65,17.39 11.14,17.39 U$2.4 | v29.04,15.87 29.68,15.23 29.68,10.28 28.92,9.52 U$1.P$16
  Bottom 0.254: v13.17,15.87 13.42,15.62 17.23,15.62 18.25,16.63 22.06,16.63 23.08,15.62 23.96,14.6 25.23,14.6 26.5,15.87 v29.04,15.87
ROW4  (via drill 0.61)
  Top 0.254: v8.85,16.76 9.87,16.76 U$2.5
  Bottom 0.254: v8.85,16.76 7.96,15.74 3.01,15.74 1.99,14.73 1.99,4.19 3.01,3.17 6.82,3.17 8.09,4.44 23.33,4.44 26,1.9 U$1.P$13
ROW5
  Top 0.254: U$2.7 10.51,15.11 9.87,15.11 7.07,15.11 5.68,16.5 5.68,23.11 U$1.P$3
ROW6
  Top 0.254: U$2.8 9.99,14.22 6.31,14.22 4.28,16.25 U$1.P$6
ROW7
  Top 0.254: U$1.P$9 8.09,13.33 9.87,13.33 U$2.9
ROW8
  Top 0.254: U$1.P$12 6.57,4.19 6.57,10.79 8.34,12.57 9.87,12.57 U$2.10
ROW9  (via drill 0.61)
  Top 0.254: v16.34,50.8 10.88,50.8 U$4.2
  Bottom 0.254: v16.34,50.8 16.98,51.43 23.58,51.43 28.16,56 28.16,56.38 U$3.P$22
ROW10  (via drill 0.61)
  Top 0.254: v14.06,49.78 13.8,50.03 10.76,50.03 U$4.3
  Bottom 0.254: v14.06,49.78 21.55,49.78 24.22,47.11 25.23,47.11 27.01,48.89 U$3.P$19
ROW11  (via drill 0.61)
  Top 0.254: v13.17,47.62 11.65,49.14 11.14,49.14 U$4.4 | v29.04,47.62 29.68,46.98 29.68,42.03 28.92,41.27 U$3.P$16
  Bottom 0.254: v13.17,47.62 13.42,47.37 17.23,47.37 18.25,48.38 22.06,48.38 23.08,47.37 23.96,46.35 25.23,46.35 26.5,47.62 v29.04,47.62
ROW12  (via drill 0.61)
  Top 0.254: v8.85,48.51 9.87,48.51 U$4.5
  Bottom 0.254: v8.85,48.51 7.96,47.49 3.01,47.49 1.99,46.48 1.99,35.94 3.01,34.92 6.82,34.92 8.09,36.19 23.33,36.19 26,33.65 U$3.P$13
ROW13
  Top 0.254: U$4.7 10.51,46.86 9.87,46.86 7.07,46.86 5.68,48.26 5.68,54.86 U$3.P$3
ROW14
  Top 0.254: U$4.8 9.99,45.97 6.31,45.97 4.28,48 U$3.P$6
ROW15
  Top 0.254: U$3.P$9 8.09,45.08 9.87,45.08 U$4.9
ROW16
  Top 0.254: U$3.P$12 6.57,35.94 6.57,42.54 8.34,44.32 9.87,44.32 U$4.10
ROW17  (via drill 0.61)
  Top 0.254: v48.1,50.8 42.63,50.8 U$6.2
  Bottom 0.254: v48.1,50.8 48.73,51.43 55.33,51.43 59.91,56 59.91,56.38 U$5.P$22
ROW18  (via drill 0.61)
  Top 0.254: v45.81,49.78 45.55,50.03 42.51,50.03 U$6.3
  Bottom 0.254: v45.81,49.78 53.3,49.78 55.97,47.11 56.98,47.11 58.76,48.89 U$5.P$19
ROW19  (via drill 0.61)
  Top 0.254: v44.92,47.62 43.4,49.14 42.89,49.14 U$6.4 | v60.8,47.62 61.43,46.98 61.43,42.03 60.67,41.27 U$5.P$16
  Bottom 0.254: v44.92,47.62 45.17,47.37 48.98,47.37 50,48.38 53.81,48.38 54.83,47.37 55.72,46.35 56.98,46.35 58.26,47.62 v60.8,47.62
ROW20  (via drill 0.61)
  Top 0.254: v40.6,48.51 41.62,48.51 U$6.5
  Bottom 0.254: v40.6,48.51 39.71,47.49 34.76,47.49 33.74,46.48 33.74,35.94 34.76,34.92 38.57,34.92 39.84,36.19 55.08,36.19 57.75,33.65 U$5.P$13
ROW21
  Top 0.254: U$6.7 42.26,46.86 41.62,46.86 38.82,46.86 37.43,48.26 37.43,54.86 U$5.P$3
ROW22
  Top 0.254: U$6.8 41.75,45.97 38.06,45.97 36.03,48 U$5.P$6
ROW23
  Top 0.254: U$5.P$9 39.84,45.08 41.62,45.08 U$6.9
ROW24
  Top 0.254: U$5.P$12 38.32,35.94 38.32,42.54 40.09,44.32 41.62,44.32 U$6.10
ROW25  (via drill 0.61)
  Top 0.254: v48.1,19.04 42.63,19.04 U$8.2
  Bottom 0.254: v48.1,19.04 48.73,19.68 55.33,19.68 59.91,24.25 59.91,24.63 U$7.P$22
ROW26  (via drill 0.61)
  Top 0.254: v45.81,18.03 45.55,18.28 42.51,18.28 U$8.3
  Bottom 0.254: v45.81,18.03 53.3,18.03 55.97,15.36 56.98,15.36 58.76,17.14 U$7.P$19
ROW27  (via drill 0.61)
  Top 0.254: v44.92,15.87 43.4,17.39 42.89,17.39 U$8.4 | v60.8,15.87 61.43,15.23 61.43,10.28 60.67,9.52 U$7.P$16
  Bottom 0.254: v44.92,15.87 45.17,15.62 48.98,15.62 50,16.63 53.81,16.63 54.83,15.62 55.72,14.6 56.98,14.6 58.26,15.87 v60.8,15.87
ROW28  (via drill 0.61)
  Top 0.254: v40.6,16.76 41.62,16.76 U$8.5
  Bottom 0.254: v40.6,16.76 39.71,15.74 34.76,15.74 33.74,14.73 33.74,4.19 34.76,3.17 38.57,3.17 39.84,4.44 55.08,4.44 57.75,1.9 U$7.P$13
ROW29
  Top 0.254: U$8.7 42.26,15.11 41.62,15.11 38.82,15.11 37.43,16.5 37.43,23.11 U$7.P$3
ROW30
  Top 0.254: U$8.8 41.75,14.22 38.06,14.22 36.03,16.25 U$7.P$6
ROW31
  Top 0.254: U$7.P$9 39.84,13.33 41.62,13.33 U$8.9
ROW32
  Top 0.254: U$7.P$12 38.32,4.19 38.32,10.79 40.09,12.57 41.62,12.57 U$8.10
RST
  Top 0.254: U$2.18 17.23,9.52 17.23,6.6 19.52,4.19 21.55,4.19 22.57,3.17 22.57,2.15 JP1.1
RST1
  Top 0.254: U$4.18 17.23,41.27 17.23,38.35 19.52,35.94 21.55,35.94 22.57,34.92 22.57,33.9 JP2.1
RST2
  Top 0.254: U$6.18 48.98,41.27 48.98,38.35 51.27,35.94 53.3,35.94 54.32,34.92 54.32,33.9 JP5.1
RST3
  Top 0.254: U$8.18 48.98,9.52 48.98,6.6 51.27,4.19 53.3,4.19 54.32,3.17 54.32,2.15 JP7.1
VCC
  Top 0.254: U$2.22 20.54,10.28 21.55,10.28 C1.1 22.57,10.28 24.85,10.28 24.85,12.06 24.35,12.57 24.35,15.11 23.58,15.87 U$2.28 21.17,15.87 20.28,16.76 20.28,20.95 U$2.34 21.04,21.67 | U$2.38 17.14,24.29 17.61,24.76 21.04,24.76 | JP3.6 21.04,28.19 21.04,24.76 | 21.04,21.67 21.04,24.76 | 22.06,21.62 22.06,21.59 | 22.06,21.62 C4.1 | 21.04,21.67 22.06,21.67 22.06,21.62
VCC1
  Top 0.254: U$4.22 20.54,42.03 21.55,42.03 C2.1 22.57,42.03 24.85,42.03 24.85,43.81 24.35,44.32 24.35,46.86 23.58,47.62 U$4.28 21.17,47.62 20.28,48.51 20.28,52.7 U$4.34 21.04,53.42 | U$4.38 17.14,56.04 17.61,56.51 21.04,56.51 | JP4.6 21.04,59.94 21.04,56.51 | 21.04,53.42 21.04,56.51 | 22.06,53.37 22.06,53.34 | 22.06,53.37 C3.1 | 21.04,53.42 22.06,53.42 22.06,53.37
VCC2
  Top 0.254: U$6.22 52.29,42.03 53.3,42.03 C5.1 54.32,42.03 56.6,42.03 56.6,43.81 56.1,44.32 56.1,46.86 55.33,47.62 U$6.28 52.92,47.62 52.03,48.51 52.03,52.7 U$6.34 52.79,53.42 | U$6.38 48.9,56.04 49.37,56.51 52.79,56.51 | JP6.6 52.79,59.94 52.79,56.51 | 52.79,53.42 52.79,56.51 | 53.81,53.37 53.81,53.34 | 53.81,53.37 C6.1 | 52.79,53.42 53.81,53.42 53.81,53.37
VCC3
  Top 0.254: U$8.22 52.29,10.28 53.3,10.28 C7.1 54.32,10.28 56.6,10.28 56.6,12.06 56.1,12.57 56.1,15.11 55.33,15.87 U$8.28 52.92,15.87 52.03,16.76 52.03,20.95 U$8.34 52.79,21.67 | U$8.38 48.9,24.29 49.37,24.76 52.79,24.76 | JP8.6 52.79,28.19 52.79,24.76 | 52.79,21.67 52.79,24.76 | 53.81,21.62 53.81,21.59 | 53.81,21.62 C8.1 | 52.79,21.67 53.81,21.67 53.81,21.62